# EAGLE board relay (EAGLE 9.6.1)
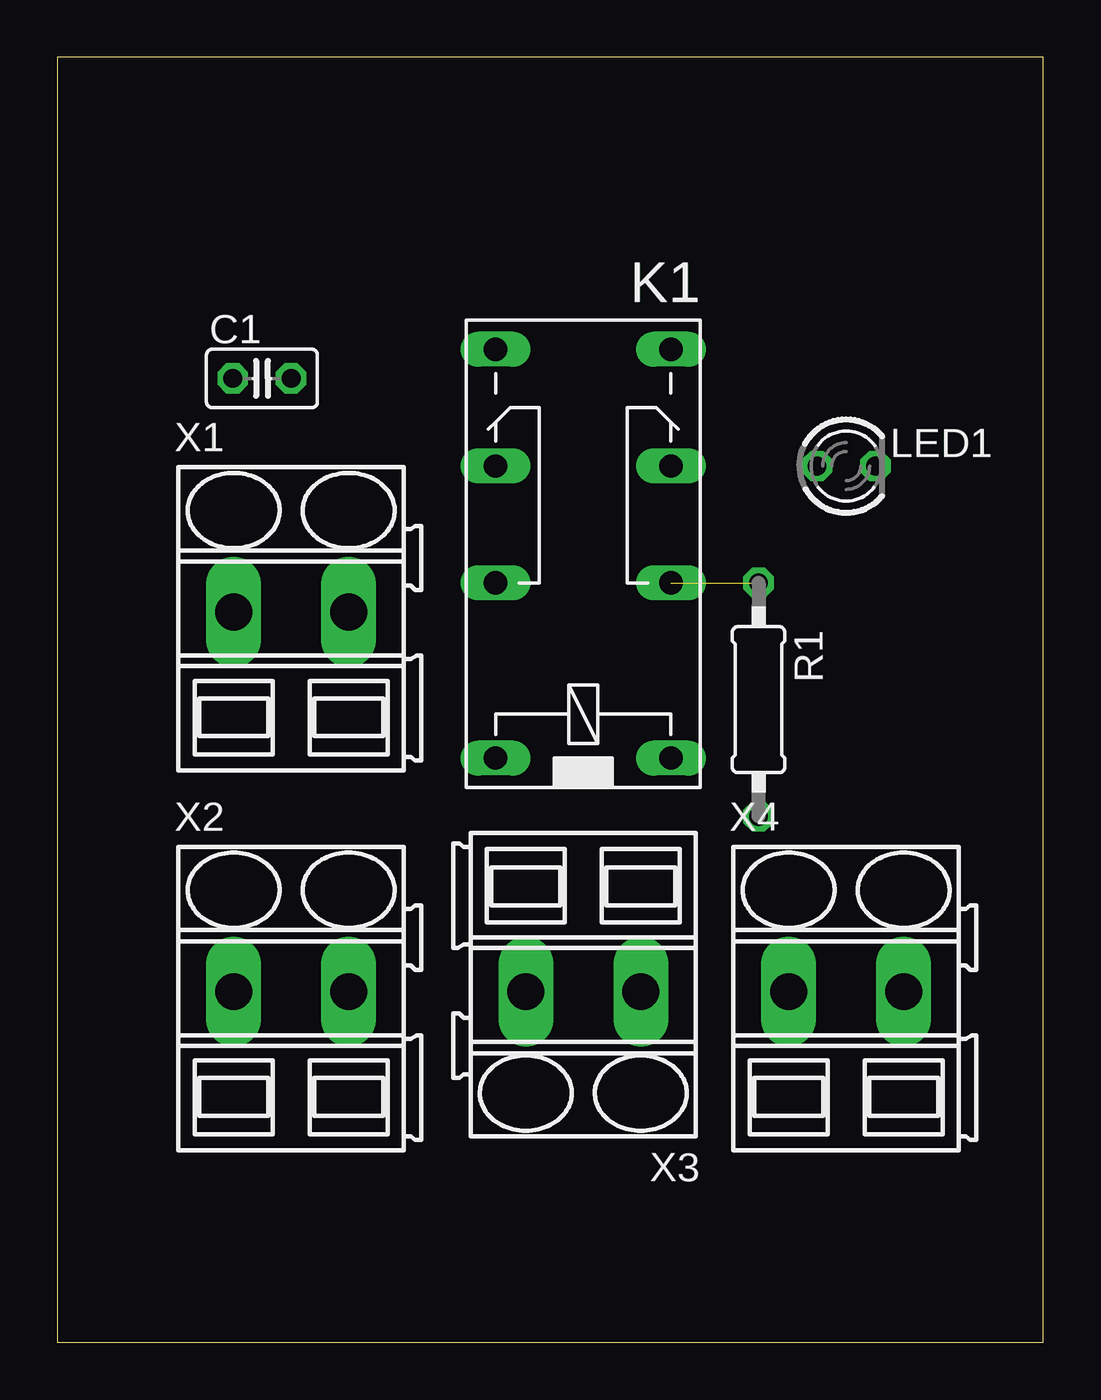
[diagram p0: board, top side]
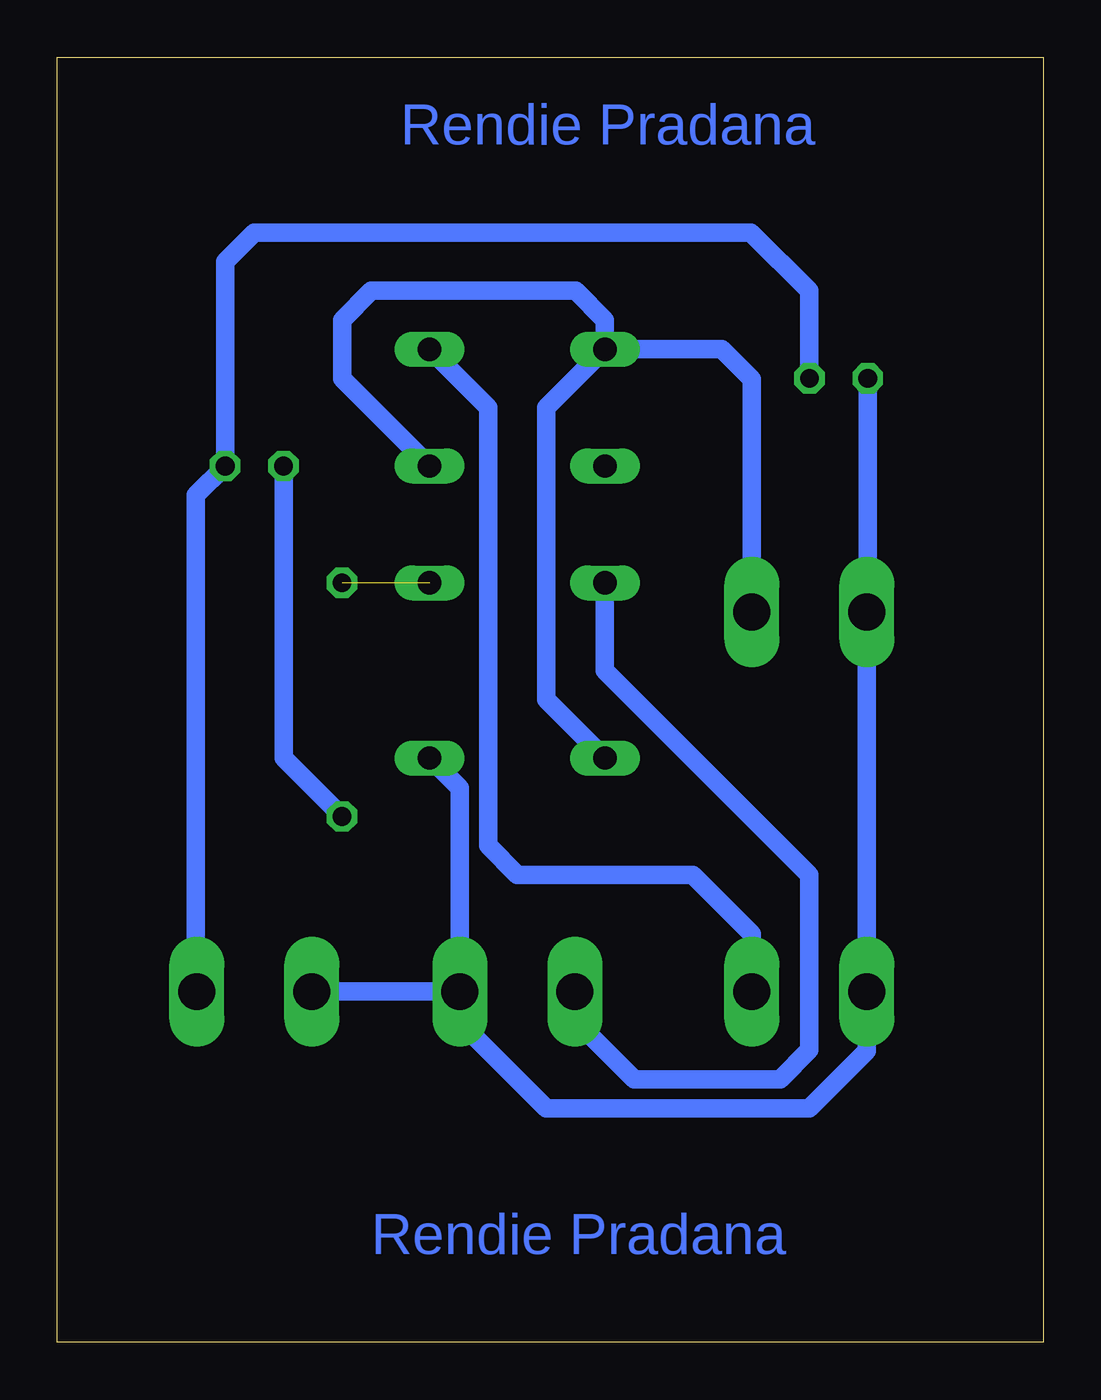
[diagram p1: board, bottom side, seen from below]

Size 42.85 x 55.87 mm. Coordinates in mm from the lower left corner, seen from the top.
Outline: 0,0 42.85,0 42.85,55.87 0,55.87 0,0
Copper layers (1*16): Top 0.035mm / dielectric 1.5mm / Bottom 0.035mm
Design rules "default": minimum track width 6mil, minimum drill 0.35mm, track to track 6mil, track to pad 6mil, pad to pad 6mil, via to via 6mil, smd to smd 6mil, copper to edge 40mil, drill to drill 6mil, minimum pad ring 10mil, minimum via ring 8mil, stop-mask expansion 4mil, vias tented up to drill 0mil, thermal gap 10mil

## Footprints (pad centres in the part's own frame; a part is rotated, then mirrored left to right if it is on the bottom)
C025-025X050 = drill 0.813 octagon: 1 -1.27,0; 2 1.27,0
351 = drill 1.016 long: 1 -3.81,-3.81; 16 -3.81,3.81; O1 8.89,-3.81; O2 8.89,3.81; P1 3.81,-3.81; P2 3.81,3.81; S1 13.97,-3.81; S2 13.97,3.81
LED3MM = drill 0.813 octagon: A -1.27,0; K 1.27,0
0207/10 = drill 0.813 octagon: 1 -5.08,0; 2 5.08,0
SMKDSP_1,5/2 = drill 1.6 pad 1.8 long: 1 -2.5,0; 2 2.5,0

## Placement (x,y rotation side)
C1  [C025-025X050]  8.89,41.91 0 top
K1  351  [351]  22.86,29.21 90 top
LED1  [LED3MM]  34.29,38.1 0 top
R1  [0207/10]  30.48,27.94 270 top
X1  SMKDSP_1,5/2  [SMKDSP_1,5/2]  10.16,31.75 0 top
X2  SMKDSP_1,5/2  [SMKDSP_1,5/2]  10.16,15.24 0 top
X3  SMKDSP_1,5/2  [SMKDSP_1,5/2]  22.86,15.24 180 top
X4  SMKDSP_1,5/2  [SMKDSP_1,5/2]  34.29,15.24 0 top

## Library data of the parts
C1 = rcl; SPICEPREFIX: C
K1 = relay; OC_FARNELL: unknown; OC_NEWARK: unknown
LED1 = led
R1 = rcl; SPICEPREFIX: R
X1-X4 = con-phoenix-smkdsp; MF: FARNELL; MPN: 1733570; OC_FARNELL: 3041244; OC_NEWARK: 69C8588

## Nets
GND: C1.1 K1.1 X1.1 X2.1 X3.1 X4.1
N$1: K1.P1 R1.1
N$2: LED1.A R1.2
O1: K1.S1 X2.2
P2: K1.P2 X3.2
S12: K1.16 K1.O1 K1.S2 X1.2
VOUT: C1.2 LED1.K X4.2

## Tracks (layer width: path | path; a pad name or v marks a point on that pad's centre or on a via)
GND
  Bottom 0.813: C1.1 7.62,31.79 X1.1 X2.1 | X3.1 X4.1 | 7.66,13.93 X2.1 | X3.1 25.36,24.09 K1.1 | X2.1 7.66,12.66 10.16,10.16 21.59,10.16 25.36,13.93 X3.1
N$1  (1 unrouted)
N$2
  Bottom 0.813: LED1.A 33.02,25.4 R1.2
O1
  Bottom 0.813: X2.2 12.66,17.74 15.24,20.32 22.86,20.32 24.13,21.59 24.13,40.64 K1.S1
P2
  Bottom 0.813: K1.P2 19.05,29.21 10.16,20.32 10.16,12.7 11.43,11.43 17.78,11.43 20.36,14.01 X3.2
S12
  Bottom 0.813: X1.2 12.66,41.87 13.97,43.18 K1.S2 | K1.S2 21.59,40.64 21.59,27.94 K1.16 | K1.S2 19.05,44.45 20.32,45.72 29.21,45.72 30.48,44.45 30.48,41.91 K1.O1
VOUT
  Bottom 0.813: X4.2 36.83,15.28 36.83,36.83 LED1.K 35.56,46.99 34.29,48.26 12.7,48.26 10.16,45.72 C1.2

## Text on the board
Bottom: Rendie Pradana | Rendie Pradana